# Altium PCB MM_2.0_power_pcb.PcbDoc
Units mm, origin at the board's own origin, x right, y up, seen from the top; angles counter-clockwise.
Board outline 65 x 47 mm, 4 copper layers (Top_Layer, INT_L1_GND, INT_L2_GND, Bottom_Layer), stack 1.586 mm thick; 27 components, 15 nets, 74 pads, 41 vias.
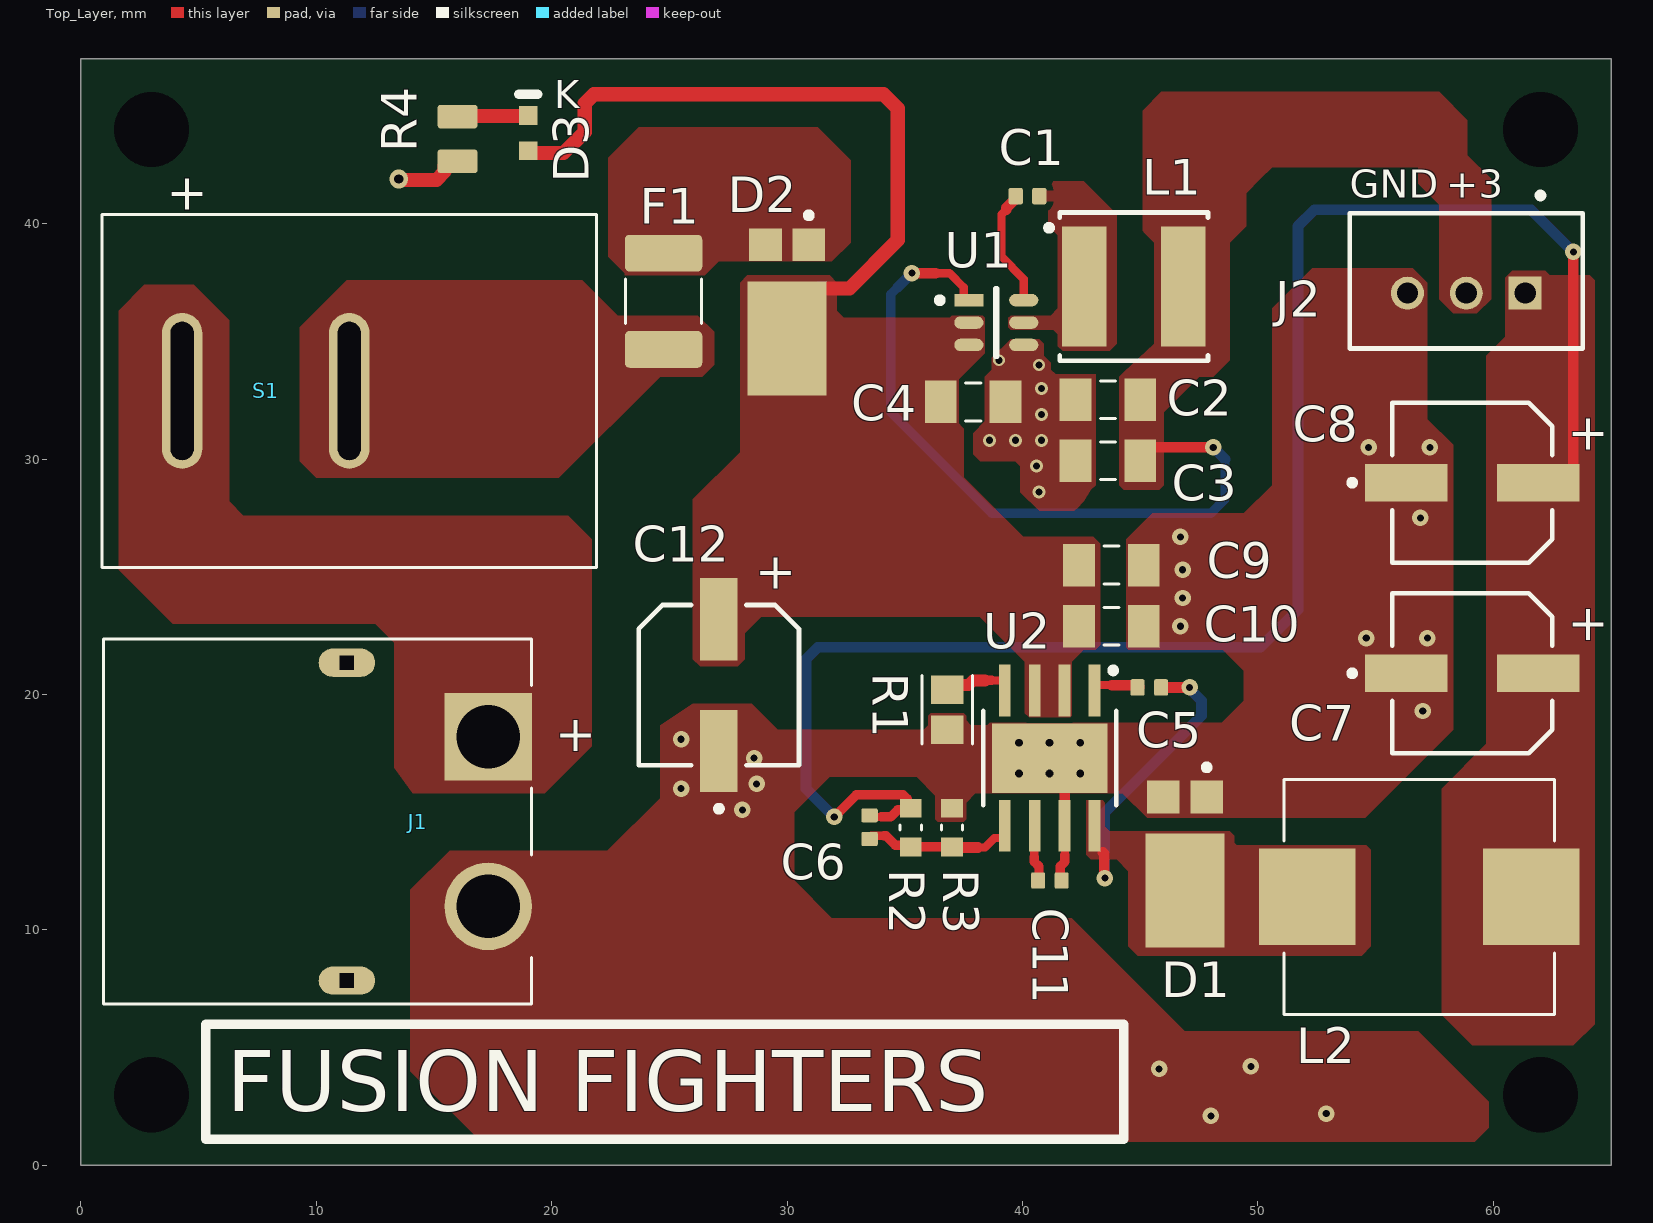
[diagram p0: Top_Layer view]
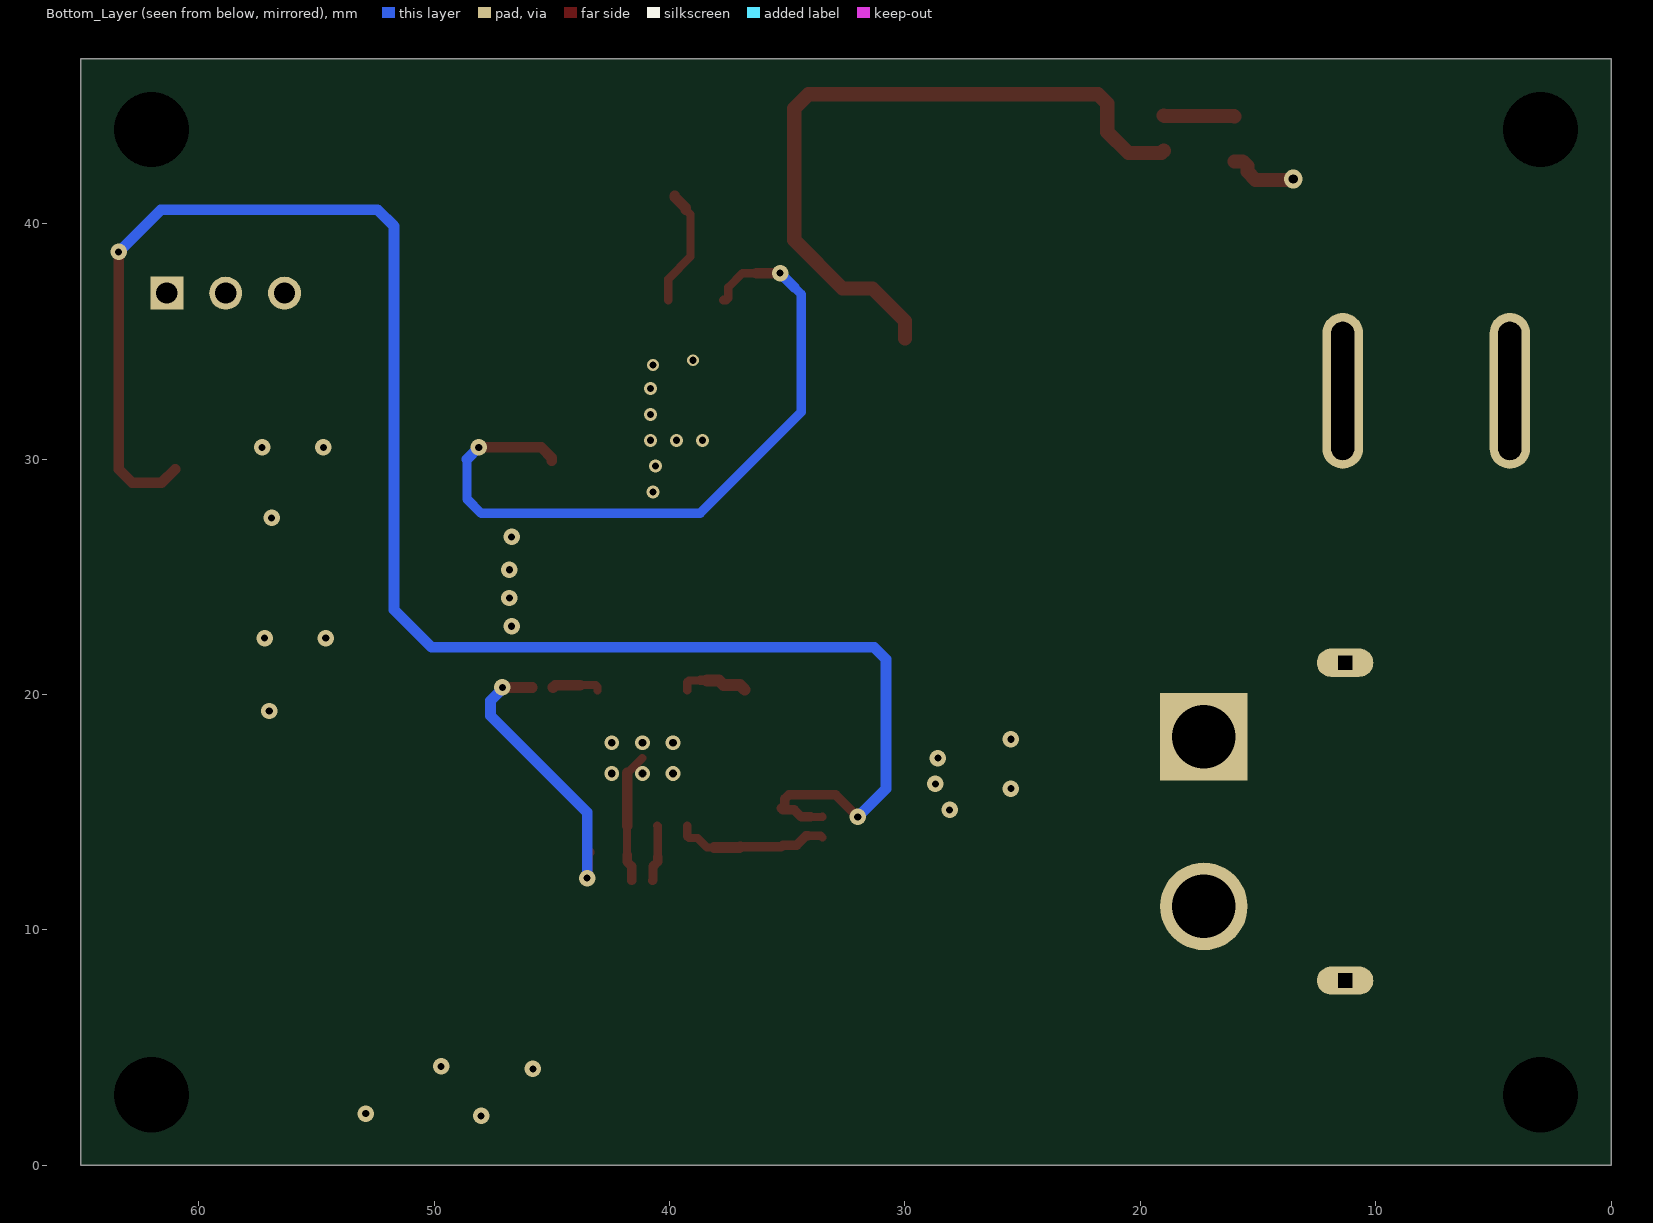
[diagram p1: Bottom_Layer view, seen from below]
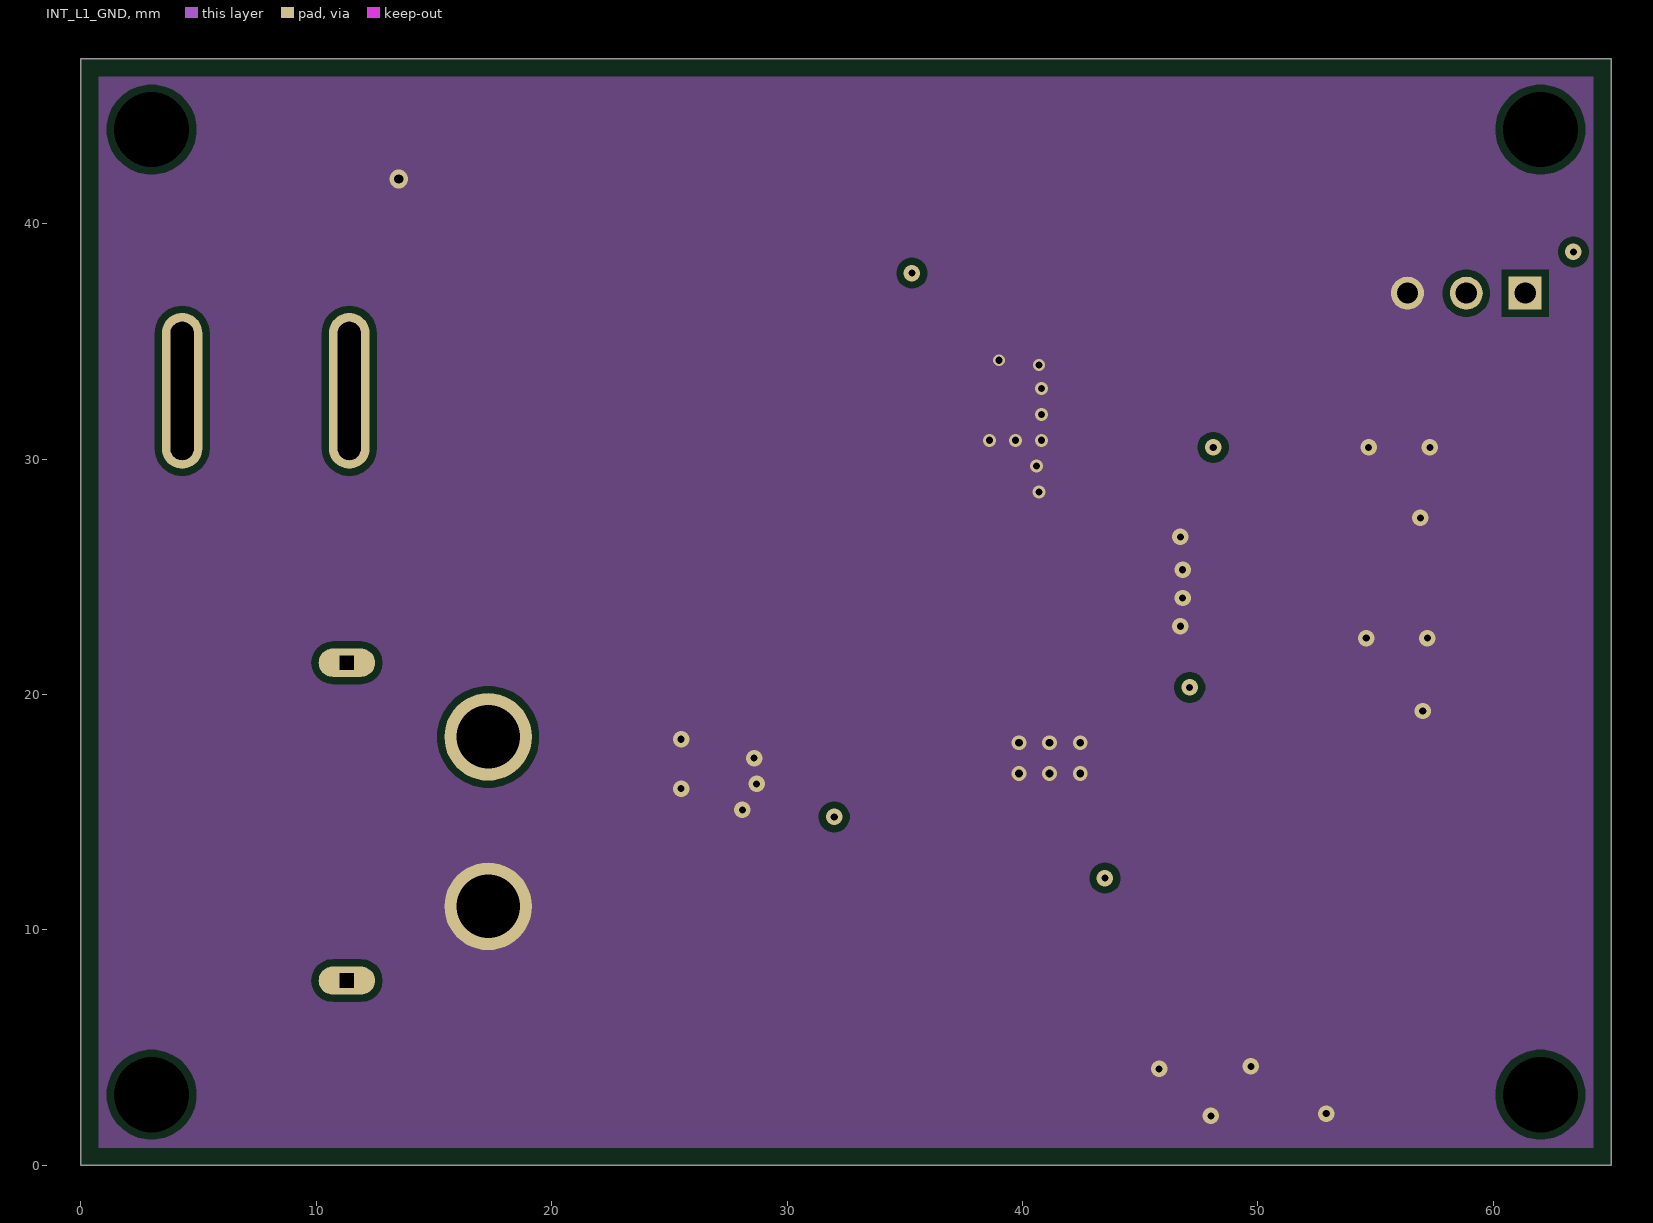
[diagram p2: INT_L1_GND]
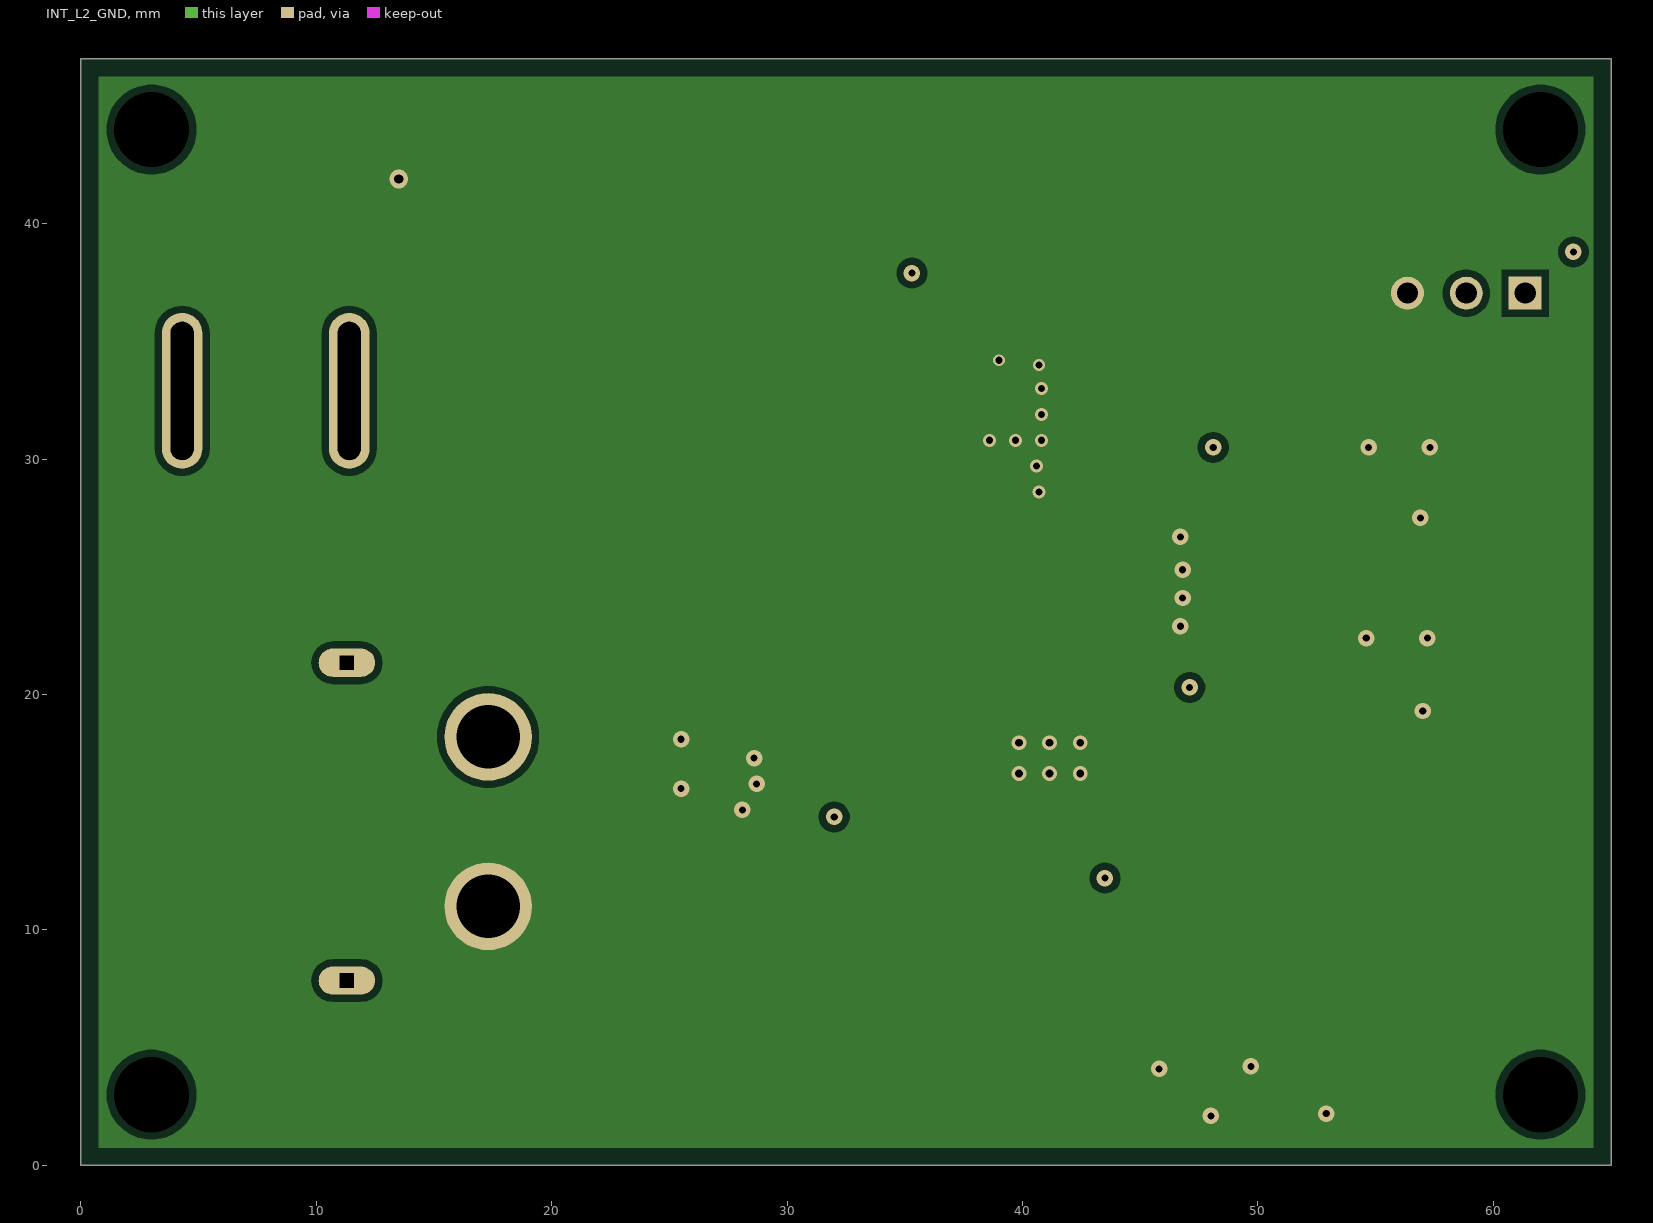
[diagram p3: INT_L2_GND]
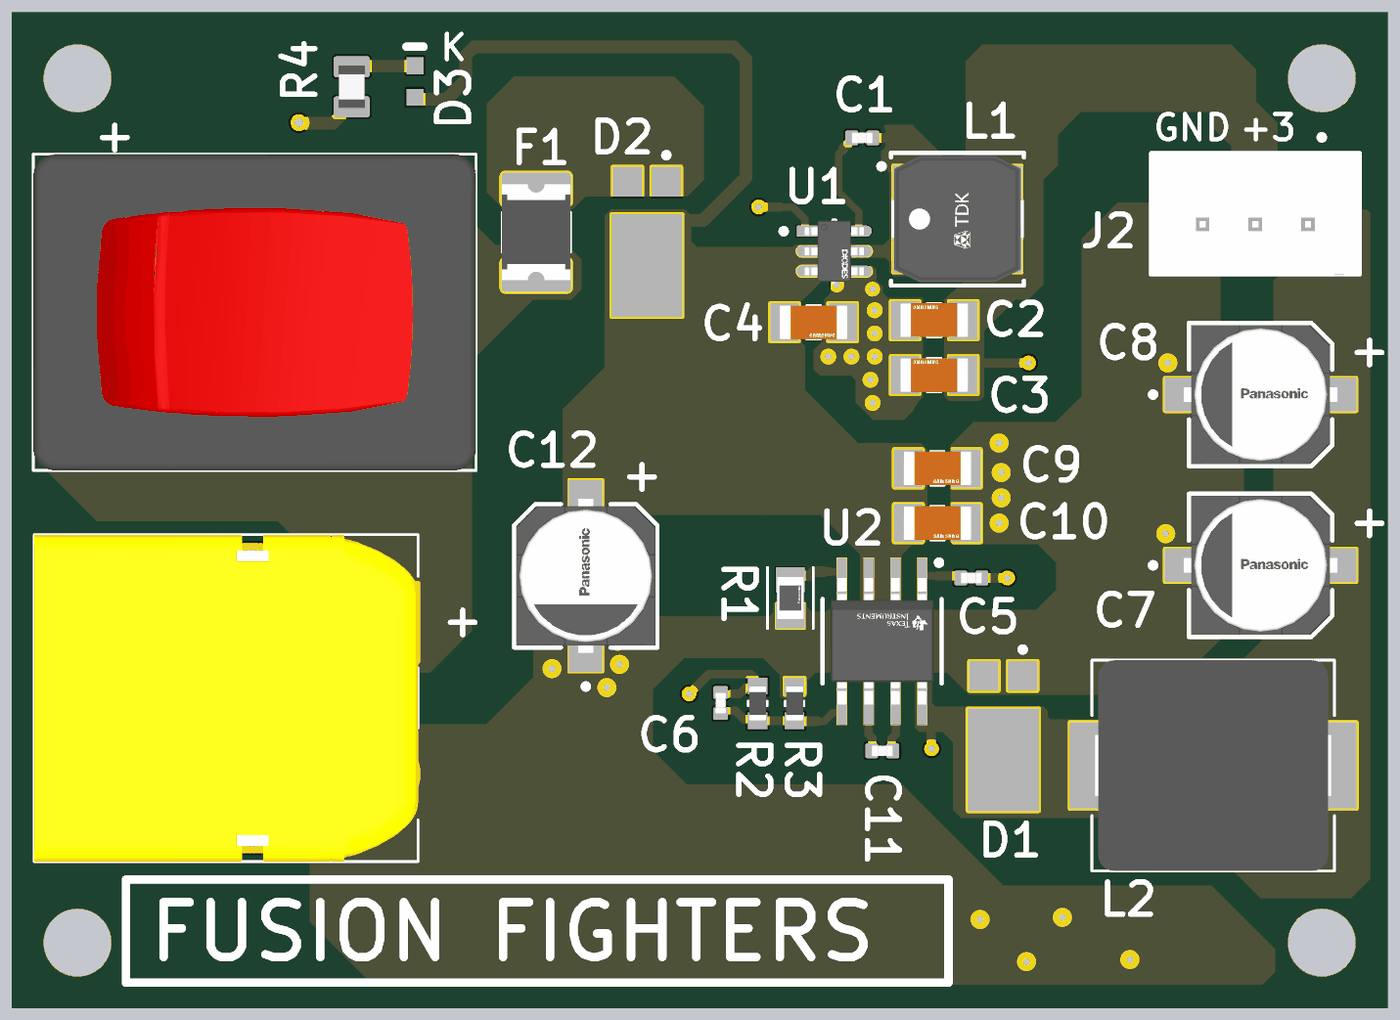
[diagram p4: 3D render of the assembled board from above, using the file's embedded part models]

## Layer stack, top to bottom
Top Solder: solder mask 0.0254, SM-001, Dk 4
Top_Layer: signal copper 0.035
Dielectric 1: prepreg 0.2104, PP-017, Dk 4.4
INT_L1_GND: signal copper 0.0152
Dielectric 3: core 1.065, Core-039, Dk 4.6
INT_L2_GND: signal copper 0.0152
Dielectric 5: prepreg 0.2104, PP-017, Dk 4.4
Bottom_Layer: signal copper 0.035
Bottom Solder: solder mask 0.0254, SM-001, Dk 4

## Board outline
0,0 65,0 65,47 0,47

## Design rules (kind name [scope] priority, off if disabled: settings)
Clearance [All] p1: gap=0.2 ignorepadtopadclearanceinfootprint=FALSE except(0: Arc-Hole Track-Hole SMDPad-Hole THPad-Hole Via-Hole Fill-Hole Poly-Hole Region-Hole Text-Hole; 0.25: Arc-Fill Arc-Poly Arc-Region Track-Fill Track-Poly Track-Region SMDPad-Fill SMDPad-Poly SMDPad-Region Fill-Fill Fill-Poly Fill-Region Poly-Poly Poly-Region Region-Region; 0.3: THPad-Fill THPad-Poly THPad-Region Via-Fill Via-Poly Via-Region; 0.35: Arc-THPad Track-THPad SMDPad-THPad THPad-THPad)
HoleSize [All] p1: absolutevalues=TRUE maxlimit=6.3 minlimit=0.25 maxpercent=80.000 minpercent=20.000
HoleToHoleClearance [All] p1: gap=0.5 allowstackedmicrovias=TRUE
MinimumSolderMaskSliver [All] p1: minsoldermaskwidth=0.15
PlaneClearance [All] p1: clearance=0.25
PolygonConnect [All] p1: connectstyle=Direct reliefconductorwidth=0.254 reliefentries=4 polygonreliefangle="90 Angle" airgapwidth=0.254
RoutingVias [All] p1: holewidth=0.3 width=0.7 viastyle="Through Hole" minholewidth=0.3 minwidth=0.4 maxholewidth=0.7 maxwidth=1.2
SilkToSilkClearance [All] p1: silktosilkclearance=0.2
SilkToSolderMaskClearance [IsPad] p1: minsilkscreentomaskgap=0.2 clearancetoexposedcopper=TRUE
SolderMaskExpansion [All] p1: expansion=0.102 istentingtop=FALSE
UnRoutedNet [All] p1: checkbadconnections=TRUE
Width [All] p1: maxlimit=1 minlimit=0.2 preferedwidth=0.3 toplayer_prefwidth=0.35 midlayer1_minwidth=0.254 midlayer1_maxwidth=0.254 midlayer1_prefwidth=0.254 midlayer2_minwidth=0.254 midlayer2_maxwidth=0.254 midlayer2_prefwidth=0.254 minimp=50.000000 maximp=50.000000 favimp=50.000000
23 further rules are at their usual default settings.

## Components (designator, comment, footprint, x,y, rotation, side; value= is the part's Value field where it differs from the comment)
C1 "100n" CAP_0402 40.21,41.175 r180 top
C2 "22u" CAPC320160X160_CL31H-0_2_N 43.624,32.525 r180 top value=22uF
C3 "22u" CAPC320160X160_CL31H-0_2_N 43.624,29.925 r180 top value=22uF
C4 "22u" CAPC320160X160_CL31H-0_2_N 37.902,32.428 r0 top value=22uF
C5 "100n" CAP_0402 45.385,20.3 r180 top
C6 "390p" CAP_0402 33.5,14.365 r270 top
C7 "100u" FP-OS-CON-SMT-C6-MFG 59.1,20.9 r0 top locked
C8 "100u" FP-OS-CON-SMT-C6-MFG 59.1,29 r0 top locked
C9 "22u" CAPC320160X160_CL31H-0_2_N 43.774,25.5 r0 top value=22uF
C10 "22u" CAPC320160X160_CL31H-0_2_N 43.774,22.9 r0 top value=22uF
C11 "8.2n" CAP_0402 41.16,12.1 r0 top
C12 "100u" FP-OS-CON-SMT-C6-MFG 27.1,20.4 r90 top locked
D1 "PDS760-13" DIOD-POWERDI5-3_V 46.9,12.8 r270 top locked
D2 "PDS760-13" DIOD-POWERDI5-3_V 30,36.25 r270 top locked
D3 "LTST-C190KSKT" LTST-C190KSKT_V 19,43.85 r90 top
F1 "1812L300/24SLER" FUSSC324X455X250-2N 24.75,36.705 r90 top locked
J1 "XT60PW-M" AMASS_XT60PW-M 11.3,14.6 r90 top locked
J2 "B3B-XH-A(LF)(SN)" FP-B3B-XH-A_LF_SN-MFG 58.85,37.575 r180 top locked
L1 "10u" FP-VLS6045EX-100M-MFG 44.725,37.325 r0 top locked
L2 "8.2u" IND_104CDMCCDS-8R2MC 56.85,11.4 r0 top locked
R1 "49.9K" FP-ERA6A_N 36.8,19.351 r90 top
R2 "91K" RESC1608X55N 35.25,14.345 r90 top
R3 "13K" RESC1608X55N 37,14.345 r270 top
R4 "5K" RES_0805 16,43.6 r90 top
S1 "RF1-1A-DC-2-R-1" SW_RF1-1A-DC-2-R-1 11.4,32.9 r0 top locked
U1 "AP63203WU-7" FP-TSOT26-IPC_B 38.884,35.8 r0 top locked
U2 "LMR14030SDDAR" FP-DDA0008E-MFG 41.15,17.3 r270 top locked

## Footprints (in the part's own frame and the unit in brackets; to place one, negate y for a bottom-side part, rotate by r counter-clockwise, add the part's x,y. Pads: shape width x height; smd on the part's side, far side on the other; paste and mask are expansions set on the pad)
AMASS_XT60PW-M [mm] "plug ROHS"
  rect 3.716x3.716 / inner round 3.716 / far side rect 3.716x3.716 hole 2.7: 1(3.6,-6)
  round 3.716 hole 2.7: 2(-3.6,-6)
  oval 1.2x2.4 hole 0.6 square: S1(6.75,0) S2(-6.75,0)
  silkscreen extent -7.75,-7.85 7.75,10.35, body extent -7.75,-7.85 7.75,10.35, height 8.4
CAP_0402 [mm]
  rrect25% 0.6x0.7 smd: 1(-0.5,0) 2(0.5,0)
  body extent -0.5,-0.26 0.5,0.26, height 0.37
CAPC320160X160_CL31H-0_2_N [mm] "25V 22uF X5R ±10% 1206 Multilayer Ceramic Capacitors MLCC - SMD/SMT ROHS"
  rect 1.354x1.806 smd: 1(-1.376,0) 2(1.376,0)
  silkscreen extent -0.32,-0.8 0.32,0.8, body extent -1.6,-0.8 1.6,0.8, height 1.8
DIOD-POWERDI5-3_V [mm] "60V 620mV@7A 7A Power-DI-5 Schottky Diodes ROHS"
  rect 1.4x1.39 smd: 1(-2.856,0.92) 2(-2.856,-0.92)
  rect 4.86x3.36 smd: 3(1.126,0)
  silkscreen extent -4.23,0.8 -3.98,1.05, body extent -2.69,-1.99 2.69,1.99, height 1.15
FP-B3B-XH-A_LF_SN-MFG [mm]
  rect 1.4x1.4 hole 0.9 paste-1000 mask+0: 1(-2.5,0.525)
  round 1.4 hole 0.9 paste-1000 mask+0: 2(0,0.525) 3(2.5,0.525)
  silkscreen extent -4.95,-3.75 4.95,2.88, body extent -5.05,-2.98 5.05,2.98, height 0.25
FP-DDA0008E-MFG [mm] "Buck Adjustable 800mV~28V 3.5A 4V~40V SO-8-EP DC-DC Converters ROHS"
  rect 2.2x0.5 smd paste-1000 mask+0: 1(-2.875,1.905) 2(-2.875,0.635) 3(-2.875,-0.635) 4(-2.875,-1.905) 5(2.875,-1.905) 6(2.875,-0.635) 7(2.875,0.635) 8(2.875,1.905)
  rect 2.95x4.9 smd paste-1000 mask-1000: 9(0,0)
  silkscreen extent -3.85,-2.83 2,2.83, body extent -4.08,-2.68 4.08,2.68, height 0.25
FP-ERA6A_N [mm] "50V 8.2nF X7R ±10% 0402 Multilayer Ceramic Capacitors MLCC - SMD/SMT ROHS"
  rect 1.205x1.362 smd paste+0 mask+0.05: 1(-0.851,0) 2(0.851,0)
  silkscreen extent -1.45,-1.08 1.45,1.08, body extent -1.7,-0.93 1.7,0.93, height 0.25
FP-OS-CON-SMT-C6-MFG [mm] "16V 100uF Polymer ±20% 24mO@100kHz 2.49A@100kHz SMD,D6.3xL5.9mm Polymer Aluminum Capacitors ROHS"
  rect 3.5x1.6 smd paste+0 mask+0.08: 1(-2.8,0) 2(2.8,0)
  silkscreen extent -5.22,-3.4 3.4,3.4, body extent -4.8,-3.65 4.8,3.65, height 0.25
FP-TSOT26-IPC_B [mm] "Buck Fixed 2A 3.3V 3.8V~32V TSOT-23-6 DC-DC Converters ROHS"
  rect 1.24x0.526 smd paste+0 mask+0.05: 1(-1.165,0.95)
  rrect100% 1.24x0.526 smd paste+0 mask+0.05: 2(-1.165,0) 3(-1.165,-0.95) 4(1.166,-0.95) 5(1.166,0) 6(1.166,0.95)
  silkscreen extent -2.52,-1.45 0.05,1.45, body extent -2.04,-1.7 2.04,1.7, height 0.25
FP-VLS6045EX-100M-MFG [mm] "3.4A 10uH ±20% 3.9A SMD,6x6mm Power Inductors ROHS"
  rect 1.9x5.1 smd paste+0 mask+0.08: 1(-2.1,0) 2(2.1,0)
  silkscreen extent -3.72,-3.15 3.15,3.15, body extent -3.25,-3.25 3.25,3.25, height 0.25
FUSSC324X455X250-2N [mm] "24V 3A 50A 6A 1812 Resettable Fuses ROHS"
  rrect25% 1.56x3.29 smd: 1(-2.045,0) 2(2.045,0)
  silkscreen extent -0.94,-1.62 0.94,1.62, body extent -2.27,-1.62 2.27,1.62, height 2.5
IND_104CDMCCDS-8R2MC [mm] "8.3A 8.2uH Molded Inductor ±20% 12A SMD,11.5x10mm Power Inductors ROHS"
  rect 4.1x4.1 smd: 1(-4.75,0) 2(4.75,0)
  silkscreen extent -5.75,-5 5.75,5, body extent -5.6,-5 5.6,5, height 4
LTST-C190KSKT_V [mm] "SMD, 2-Leads, Body 1.6x0.8mm, LED 603"
  rect 0.8x0.8 smd: 1(-0.75,0) 2(0.75,0)
  silkscreen extent 1.65,-0.4 1.65,0.4, body extent -0.8,-0.4 0.8,0.4, height 0.9
RES_0805 [mm]
  rrect25% 1x1.7 smd: 1(-0.95,0) 2(0.95,0)
  body extent -1,-0.63 1,0.63, height 0.47
RESC1608X55N [mm] "100mW Thick Film Resistor 75V ±100ppm/? ±1% 91kO 0603 Chip Resistor - Surface Mount ROHS"
  rect 0.79x0.93 smd: 1(-0.82,0) 2(0.82,0)
  silkscreen extent -0.11,-0.45 0.11,0.45, body extent -0.8,-0.4 0.8,0.4, height 0.55
SW_RF1-1A-DC-2-R-1 [mm] "Rocker Switch"
  oval 1.72x6.62 hole 0.98 slot 5.88 at 90 deg: 1(-7.1,0) 2(0,0)
  silkscreen extent -10.5,-7.5 10.5,7.5, body extent -10.5,-7.5 10.5,7.5, height 17.01

## Part data
C1 C5 C6 C11: library part CL05B104KO5NNNC, "0.1 ÂµF Â±10% 16V Ceramic Capacitor X7R 0402 (1005 Metric)", Package="SMD-2-2 Samsung", Check_prices=https://www.snapeda.com/parts/CL05B104KO5NNNC/Samsung/view-part/?ref=eda, MF=Samsung, MP=CL05B104KO5NNNC, SnapEDA_Link=https://www.snapeda.com/parts/CL05B104KO5NNNC/Samsung/view-part/?ref=snap
C2 C3 C4 C9 C10: library part CMP-13271-000012-2, "Ceramic Capacitor, Multilayer, Ceramic, 25V, 10% +Tol, 10% -Tol, X5R, 15% TC, 22uF, Surface Mount, 1206", Capacitance=22uF, Case/Package=1206, Dielectric=X5R, Digikey Part Number=1276-3047-1-ND, Manufacturer=Samsung, Max Operating Temperature=85°C, Min Operating Temperature=-55°C, Mouser Part Number=187-CL31A226KAHNNNE, Package=CL31H-0.2, Part Number=CL31A226KAHNNNE, Temperature="-55°C to +85°C", Temperature Coefficient=15%, Temperature Range High=+85°C, Tolerance=10%, Voltage Rating=25V, Automotive=No, ComponentLink1Description=Upverter, ComponentLink1URL=https://upverter.com/part/id/4e7a76ad8fe2f2e1/, ComponentLink2Description=Datasheet, ComponentLink2URL=https://product.samsungsem.com/mlcc/CL31A226KAHNNN.do, Digikey Description="CAP CER 22UF 25V X5R 1206", Height=1.8mm, helpURL=https://upverter.com/part/id/4e7a76ad8fe2f2e1/, Ipc Land Pattern Name=CAPC320160X160, Lead Free=Yes, Material=Ceramic, RoHS=TRUE, Supplier 1=Digi-Key, Supplier 2=Mouser, Supplier Part Number 1=1276-3047-1-ND, Supplier Part Number 2=187-CL31A226KAHNNNE, Symbol Hash=fb88589c83559698c54462c48d907c3ddae810bd717f4f20b193cecb944ab7ab, Temperature Characteristic=X5R, Temperature Range Low=-55°C, Verification Version=0.0.0.3, Voltage Rating (DC)=25V
C7 C8 C12: library part CMP-05428-000037-2, "Conductive Polymer Aluminum Solid Capacitors (OS-CON) 100uF ±20% 16V", Capacitance=100uF, Case/Package=Radial, ESR (Equivalent Series Resistance)=24mR, Leakage Current=300uA, Max Operating Temperature=105°C, Min Operating Temperature=-55°C, Package Quantity=1000, Ripple Current=2.49A, Tolerance=20%, Voltage=16V, Construction=Cylindrical, Diameter=6.3mm, Dissipation Factor=12%, Height=5.9mm, Height - Seated (Max)=0.236inch, Lead Free="Lead Free", Length=5.9mm, Life (Hours)=2000Hour, Mount="Surface Mount", Number of Pins=6, Packaging="Tape and Reel", Polarity=Polar, Radiation Hardening=No, REACH SVHC="No SVHC", Ripple Current (AC)=2.49A, RoHS Compliant=Yes, Series="OS-CON™, SVPC", Termination=SMD/SMT, Voltage Rating=16V, Voltage Rating (DC)=16V
D1 D2: library part CMP-2000-07476-1, "Schottky Barrier Rectifier, 60 V, 7 A, -65 to 150 degC, 3-Pin SMD, RoHS, Tape and Reel", Average Rectified Current=7A, Case\/Package=SMD/SMT, Forward Voltage=620mV, Manufacturer="Diodes Inc", Max Forward Surge Current (Ifsm)=275A, Max Operating Temperature=150degC, Max Repetitive Reverse Voltage (Vrrm)=60V, Min Operating Temperature=-65degC, Package Description="3-Pin Surface Mount Device, Body 3.975 x 5.375 mm, Pitch 1.84 mm", Package Quantity=5000, Package Reference=POWERDI5-3, Peak Reverse Current=200uA, Contact Plating=Matte, Current Rating=7A, Datasheet URL=https://www.diodes.com/assets/Datasheets/ds30477.pdf, Datasheet Version="Rev. 13-2, 10/2012", Element Configuration=CommonAnode, Forward Current=7A, Height=1.15mm, Lead Free=LeadFree, Length=4.05mm, Manufacturer URL=http://www.diodes.com/, Mount=SurfaceMount, Mounting Technology=SurfaceMount, Number of Pins=5, Output Current=7A, Packaging=TapeandReel, Peak Non-Repetitive Surge Current=275A, Polarity=Standard, Radiation Hardening=No, REACH SVHC=NoSVHC, Reverse Voltage (DC)=60V, RoHSCompliant=true, Voltage Rating (DC)=60V, Weight=0.003386oz, Width=5.45mm
D3: library part CMP-1674-00009-1, "LED Uni-Color Yellow, 75 mW, 30 mA, -30 to 85 degC, 2-Pin SMD, RoHS, Tape and Reel", Case Code (Imperial)=0603, Case Code (Metric)=1608, Max Operating Temperature="155 degC", Min Operating Temperature="-55 degC", Package Quantity=5000, Power Rating="100 mW", Resistance="12 kohm", Tolerance=1%, Voltage Rating="50 V", Case\Package=0603, ComponentLink1Description="Manufacturer URL", ComponentLink1URL=http://www.us.liteon.com/, ComponentLink2Description=Datasheet, ComponentLink2URL=http://optoelectronics.liteon.com/upload/download/DS-22-99-0189/S_110_LTST-C190KSKT.pdf, DatasheetVersion="Rev. I, 10/2012", Height="0.45 mm", Length="1.6 mm", Mount="Surface Mount", PackageDescription="2-Pin Surface Mount Device, Body 1.6 x 0.8 mm", PackageReference=C190KSKT, Packaging="Tape and Reel", Pins=2, REACH SVHC="No SVHC", RoHSCompliant=true, Voltage Rating (DC)="50 V", Width="0.8 mm"
F1: "Polymeric PTC Resettable Fuse 24V 3 A Ih Surface Mount 1812 (4532 Metric), Concave", Package=None, Availability="In Stock", Check_prices=https://www.snapeda.com/parts/1812L300/24SLER/Littelfuse/view-part/?ref=eda, MF="Littelfuse Inc.", MP=1812L300/24SLER, Price=None, Purchase-URL=https://pricing.snapeda.com/search/part/1812L300/24SLER/?ref=eda, SnapEDA_Link=https://www.snapeda.com/parts/1812L300/24SLER/Littelfuse/view-part/?ref=snap
J1: "Socket, DC supply, male, PIN: 2", Package=Package, Availability="Not in stock", Check_prices=https://www.snapeda.com/parts/XT60PW-M/AMASS/view-part/?ref=eda, MF=AMASS, MP=XT60PW-M, Price=None, SnapEDA_Link=https://www.snapeda.com/parts/XT60PW-M/AMASS/view-part/?ref=snap
J2: library part CMP-17439-000014-3, "CONN HEADER VERT 3POS 2.5MM", Color=Natural, Contact Resistance=20mR, Current Rating=3A, Flammability Rating="UL94 V-0", Housing Color=White, Insulation Resistance=1GR, Max Operating Temperature=85°C, Max Voltage Rating (AC)=250V, Min Operating Temperature=-25°C, Connector Type=Header, Contact Finish - Mating=TIN, Contact Material=Brass, Contact Plating=Tin, Contact Shape=Square, Contact Type="Male Pin", Depth=5.75mm, Fastening Type=Detent, Gender=Male, Housing Material=Polyamide, Insulation Color=Natural, Insulation Material=Nylon, Lead Free="Lead Free", Lead Pitch=2.5mm, Length=9.9mm, Max Current Rating=3A, Max Voltage Rating (DC)=250V, Mount="Through Hole", Number of Contacts=3, Number of Positions=3, Number of Rows=1, Orientation=Straight, Packaging=Bulk, Pitch=2.5mm, REACH SVHC="No SVHC", Series=XH, Termination=Solder, Voltage Rating=250V, Voltage Rating (AC)=250V, Wire/Cable Gauge=22AWG
L1: library part CMP-08253-000184-1, "FIXED IND 10UH 3.4A 61 MOHM SMD", Case/Package=Nonstandard, Current Rating=3.4A, DC Resistance (DCR)=61mR, Inductance=10uH, Inductance Tolerance=20%, Max Operating Temperature=105°C, Min Operating Temperature=-40°C, Resistor Type=Wirewound, Saturation Current=3.9A, Test Frequency=100kHz, Core Material=Ferrite, Height - Seated (Max)=0.177inch, Lead Free="Lead Free", Length=0.236inch, Mount="Surface Mount", Packaging="Cut Tape", REACH SVHC="No SVHC", RMS Current (Irms)=3.4A, RoHS Compliant=Yes, Shielding=Shielded, Tolerance=20%, Width=0.236inch
L2: library part 104CDMCCDS-8R2MC, "Inductor Power Shielded/Molded Wirewound 8.2uH 20% 100KHz Metal 8.3A 0.027Ohm DCR 4040 T/R", Package="Nonstandard Sumida", Availability="In Stock", Check_prices=https://www.snapeda.com/parts/104CDMCCDS-8R2MC/Sumida/view-part/?ref=eda, MF=Sumida, MP=104CDMCCDS-8R2MC, Price=None, Purchase-URL=https://pricing.snapeda.com/search/part/104CDMCCDS-8R2MC/?ref=eda, SnapEDA_Link=https://www.snapeda.com/parts/104CDMCCDS-8R2MC/Sumida/view-part/?ref=snap
R1: library part CMP-2001-00839-2, "Res Thin Film 0805 49.9K Ohm 0.1% 0.125W(1/8W) +/-25ppm/ßC SMD Automotive T/R", Case Code (Imperial)=0805, Case Code (Metric)=2012, Max Operating Temperature=155°C, Max Power Dissipation=125mW, Min Operating Temperature=-55°C, Resistance=49.9kΩ, Temperature Coefficient=25ppm/°C, Tolerance=0.1%, Voltage Rating=100V, Case/Package=0805, Composition="Metal Film, Thin Film", Contact Plating=Tin, Depth=1.25mm, Features="Automotive AEC-Q200", Height=500µm, Lead Free="Lead Free", Length=2mm, Lifecycle Status=Production, Military Standard=Not, Mount="Surface Mount", Number of Pins=2, Number of Terminations=2, Packaging="Cut Tape", Power Rating=125mW, Radiation Hardening=No, REACH SVHC=Unknown, RoHS=Compliant, Schedule B="8533210045, 8533210045|8533210045|8533210045|8533210045|8533210045|8533210045|8533210045|8533210045|8533210045|8533210045|8533210045|8533210045|8533210045|8533210045|8533210045|8533210045, 8533210045|8533210045|8533210045|8533210045|8533210045|8533210045|8533210045|8533210045|8533210045|8533210045|8533210045|8533210045|8533210045|8533210045|8533210045|8533210045|8533210045, 8533210045|8533210045|8533210045|8533210045|8533210045|8533210045|8533210045|8533210045|8533210045|8533210045|8533210045|8533210045|8533210045|8533210045|8533210045|8533210045|8533210045|8533210045", Termination=SMD/SMT, Voltage Rating (DC)=100V, Weight=5.499807mg
R2 R3: library part RC0603FR-0791KL, "91 kOhms Â±1% 0.1W, 1/10W Chip Resistor 0603 (1608 Metric) Moisture Resistant Thick Film", Package="1608 Yageo", Check_prices=https://www.snapeda.com/parts/RC0603FR-0791KL/Yageo/view-part/?ref=eda, MF=Yageo, MP=RC0603FR-0791KL, SnapEDA_Link=https://www.snapeda.com/parts/RC0603FR-0791KL/Yageo/view-part/?ref=snap
R4: library part RES_0805, "Resistor SMD 0805"
S1: "Switch, Mini Rocker, 2P SPST OFF-ON, Red w/ Print, VDC", Package=None, Check_prices=https://www.snapeda.com/parts/RF1-1A-DC-2-R-1/Switch+Components/view-part/?ref=eda, MF="Switch Components", MP=RF1-1A-DC-2-R-1, SnapEDA_Link=https://www.snapeda.com/parts/RF1-1A-DC-2-R-1/Switch+Components/view-part/?ref=snap
U1: library part CMP-12757-000006-1, "IC REG BUCK 3.3V 2A TSOT26", Ambient Temperature Range High=+85°C, Ambient Temperature Range Low=-40°C, Manufacturer="Diodes Inc.", Max Junction Temp=+160°C, Max Supply Voltage=32V, Min Supply Voltage=3.8V, Nominal Supply Current=22uA, Output Current=2A, Output Voltage=3.3V, Package=TSOT26, Switching Frequency=1.1MHz, Temperature="to +160°C", Automotive=No, Category=IC, ComponentLink2Description=Datasheet, ComponentLink2URL=https://www.diodes.com/assets/Datasheets/AP63200-AP63201-AP63203-AP63205.pdf, Device Class L1="Integrated Circuits (ICs)", Device Class L2="Power Management ICs", Device Class L3="Voltage Regulators - Switching", Digikey Description="IC REG BUCK 3.3V 2A TSOT26", Footprint Url=https://www.diodes.com/assets/Package-Files/TSOT26.pdf, Height=1mm, Lead Free=Yes, Manufacturer Part Number=AP63203WU-7, Mouser Description="AP63203 Series 3.3 V 2 A SMT Fixed Low IQ Synchronous Buck - TSOT-26", Number Of Outputs=1, Octopart=https://octopart.com/ap63203wu-7-diodes+inc.-98099550, Output Type=Fixed, RoHS=TRUE, Standoff Height=0.01mm, Switching Topology=Buck, Temperature Range High=+160°C
U2: library part CMP-04918-000074-1, "IC REG BUCK ADJ 3.5A 8SOPWR", Manufacturer="Texas Instruments", Max Junction Temp=+125°C, Max Supply Voltage=40V, Min Supply Voltage=4V, Nominal Supply Current=40uA, Output Current=3.5A, Output Voltage=0.8-28V, Package=DDA0008E, Switching Frequency=200-2500kHz, Temperature="-40°C to +125°C", Temperature Range Low=-40°C, Automotive=No, Category=IC, ComponentLink2Description=Datasheet, ComponentLink2URL=http://www.ti.com/lit/ds/symlink/lmr14030.pdf, Device Class L1="Integrated Circuits (ICs)", Device Class L2="Power Management ICs", Device Class L3="Voltage Regulators - Switching", Digikey Description="IC REG BUCK ADJ 3.5A 8SOPWR", Height=1.7mm, Ipc Land Pattern Name=SOIC127P600X170-8, Lead Free=Yes, Manufacturer Part Number=LMR14030SDDAR, Max Duty Cycle=97%, Mouser Description="40V, 3.5A SIMPLE SWITCHER, 2.2MHz Step-Down Regulator with 40uA IQ 8-SO PowerPAD -40 to 125", Number Of Outputs=1, Octopart=https://octopart.com/lmr14030sddar-texas+instruments-55347267, Output Type=AdjustableProgrammable, RoHS=TRUE, Standoff Height=0mm, Switching Topology=Buck, Temperature Range High=+125°C

## Free pads (board coordinates)
  round 1.524 hole 3.2: MH(3,3) MH(3,44) MH(62,3) MH(62,44)

## Via types
v1: diameter 0.7, hole 0.3, Top_Layer to Bottom_Layer, 25 vias
v2: diameter 0.55, hole 0.3, Top_Layer to Bottom_Layer, 7 vias
v3: diameter 0.63, hole 0.33, Top_Layer to Bottom_Layer, 6 vias
v4: diameter 0.5, hole 0.3, Top_Layer to Bottom_Layer, 2 vias
v5: diameter 0.8, hole 0.4, Top_Layer to Bottom_Layer, 1 vias

## Nets (pads, with @x,y where several pads share a name; then routed paths per layer and width w, separated by ;. In a path a pad name is that pad's centre, name@x,y a point inside that pad or via, vN(x,y) a via of type N, cw(c..) or ccw(c..) an arc to the next point about the centre after c; other vN are vias at no path point)
+3V3_BUCK: C2.1 C3.1 J2.2 L1.2 U1.1 | length 31.5
  Top_Layer w0.35: 36.3,37.9 36.9,37.9 37.5,37.3 37.5,36.838 37.588,36.75 U1.1 U1.1@37.7,36.769
  Top_Layer w0.45: v1(35.3,37.9) 36.3,37.9 ; C3.1 45,30.048 45.452,30.5 v1(48.1,30.5)
  Bottom_Layer w0.4: 34.7,37.3 34.4,37 34.4,32 38.7,27.7 48,27.7 48.6,28.3 48.6,30
  Bottom_Layer w0.45: 34.7,37.3 v1(35.3,37.9) ; v1(48.1,30.5) 48.6,30
+6V_BUCK: C6.1 C7.2 C8.2 J2.1 L2.2 R2.2 | length 76
  Top_Layer w0.35: C6.1@33.5,14.805 33.505,14.8 34,14.8
  Top_Layer w0.4: v1(32,14.8) 32.943,15.743 34.923,15.743 35.1,15.566 35.1,15.315 R2.2 35.185,15.1 34.7,15.1 34.4,14.8 34,14.8
  Top_Layer w0.45: C8.2@61,29.575 61.575,29 C8.2 62.825,29 63.4,29.575 v1(63.4,38.8)
  Bottom_Layer w0.45: v1(32,14.8) 30.8,16 30.8,21.5 31.3,22 50.1,22 51.7,23.6 51.7,39.9 52.4,40.6 61.6,40.6 v1(63.4,38.8)
BUCK1_BST: C1.2 U1.6 | length 5.1
  Top_Layer w0.35: 39.3,40.6 39.1,40.4 39.1,38.6 40.05,37.65 U1.6
  Top_Layer w0.45: 39.3,40.6 39.3,40.665 39.77,41.135 C1.2@39.77,41.175
BUCK1_SW: C1.1 L1.1 U1.5
BUCK2_BOOT: C5.2 U2.1 | length 2.1
  Top_Layer w0.35: U2.1 43.055,20.325 43.13,20.4 43.8,20.4
  Top_Layer w0.45: 43.8,20.4 44.85,20.4 44.945,20.305 C5.2@44.945,20.3
BUCK2_FB: C6.2 R2.1 R3.2 U2.5 | length 6.6
  Top_Layer w0.35: C6.2@33.5,13.925 33.575,14 34.1,14 ; 38.1,13.5 38.4,13.5 38.8,13.9 39.17,13.9 39.245,13.975 U2.5
  Top_Layer w0.4: 34.1,14 34.2,14 34.6,13.6 35.175,13.6 R2.1 R3.2
  Top_Layer w0.45: R3.2 37.025,13.5 38.1,13.5
BUCK2_RT: R1.2 U2.4 | length 3
  Top_Layer w0.35: 38.7,20.6 39.17,20.6 39.245,20.525 U2.4
  Top_Layer w0.4: 38.4,20.6 38.7,20.6
  Top_Layer w0.5: R1.2 36.998,20.4 37.7,20.4 37.9,20.6 38.4,20.6
BUCK2_SS: C11.1 U2.6 | length 2.4
  Top_Layer w0.35: 40.5,13.1 40.5,14.41 U2.6
  Top_Layer w0.4: 40.5,13.1 40.5,12.9 40.7,12.7 40.7,12.12 C11.1@40.72,12.1
BUCK2_SW: C5.1 D1.3 L2.1 U2.8 | length 12.4
  Top_Layer w0.45: 43.4,13.3 43.475,13.225 43.475,12.225 v1(43.5,12.2) ; C5.1@45.825,20.3 v1(47.1,20.3)
  Bottom_Layer w0.45: v1(43.5,12.2) 43.5,15 47.6,19.1 47.6,19.732 47.1,20.232 v1(47.1,20.3)
DIODE_A: D2.1 D2.2 F1.2
GND: C2.2 C3.2 C4.2 C7.1 C8.1 C9.2 C10.2 C11.2 C12.1 D1.1 D1.2 J1.2 J2.3 R1.1 R3.1 R4.1 U1.4 U2.7 U2.9 | length 8.5
  Top_Layer w0.35: U2.9 U2.9@41.785,16.665 ; U2.7 41.8,14.41 41.8,13.2
  Top_Layer w0.4: C11.2@41.6,12.1 41.6,12.7 41.8,12.9 41.8,13.2
  Top_Layer w0.45: U2.7 U2.9@41.785,16.665
  Top_Layer w0.6: v5(13.5,41.9) 13.538,41.862 15.099,41.862 15.45,42.213 15.45,42.45 15.65,42.65 R4.1
  other v1: 48,2.1 52.9,2.2 45.8,4.1 49.7,4.2 28.1,15.1 25.5,16 28.7,16.2 28.6,17.3 25.5,18.1 57,19.3 54.6,22.4 57.2,22.4 46.7,22.9 46.8,24.1 46.8,25.3 46.7,26.7 56.9,27.5 54.7,30.5 57.3,30.5
  other v2: 40.7,28.6 40.6,29.7 38.6,30.8 39.7,30.8 40.8,30.8 40.8,31.9 40.8,33
  other v3: 39.85,16.65 41.15,16.65 42.45,16.65 39.85,17.95 41.15,17.95 42.45,17.95
  other v4: 40.7,34 39,34.2
PLED_K: D3.2 R4.2 | length 3
  Top_Layer w0.6: R4.2 16.025,44.575 18.975,44.575 D3.2
VBAT: J1.1 S1.1
VBAT_REG: C4.1 C9.1 C10.1 C12.2 D2.3 D3.1 U1.2 U1.3 U2.2 U2.3 | length 30.2
  Top_Layer w0.6: D3.1 19.1,43 20.5,43 21.4,43.9 21.4,45.1 21.8,45.5 34.1,45.5 34.7,44.9 34.7,39.3 32.654,37.254 31.38,37.254 30,35.874 D2.3
VBAT_SW: F1.1 S1.2
pads on no net: J1.S1 J1.S2

## Polygon pours and split planes (outlines as drawn)
DIODE_A on Top_Layer "DIODE_A_L01_P031" (solid, pour order 31): 23.1,37.8 23.1,37.9 22.4,38.6 22.4,42.8 23.7,44.1 31.3,44.1 32.7,42.7 32.7,39.2 31.9,38.4 27.1,38.4 26.5,37.8
VBAT_SW on Top_Layer "VBAT_SW_L01_P029" (solid, pour order 29): 11.3,37.6 9.3,35.6 9.3,29.9 10,29.2 20.3,29.2 24.6,33.5 26.4,33.5 26.9,34 26.9,35.4 26.2,36.1 22.8,36.1 21.3,37.6
VBAT on Top_Layer "VBAT_L01_P028" (solid, pour order 28): 14.1,15.8 19.7,15.8 21.7,17.8 21.7,26.6 20.7,27.6 6.9,27.6 6.3,28.2 6.3,35.9 4.8,37.4 2.7,37.4 1.6,36.3 1.6,25.3 3.9,23 12.3,23 12.5,23 13.3,22.2 13.3,16.902 13.309,16.892
GND on Top_Layer "GND_L01_P026" (solid, pour order 26): 26,19.6 28.5,19.6 29.6,18.5 35.8,18.5 36,18.7 36,19.1 36.1,19.2 37.5,19.2 37.6,19.1 37.6,18.9 37.8,18.7 38.5,18.7 38.6,18.8 43.6,18.8 48.468,18.8 49.4,19.732 49.4,21 48.5,21.9 44.5,21.9 44.4,22 44.4,26.6 45.5,27.7 49.4,27.7 50.6,28.9 50.6,36.4 52.316,38.116 56.584,38.116 57.2,37.5 57.2,31.7 58.3,30.6 58.3,18.5 54.556,14.756 45.286,14.756 44.242,15.8 38,15.8 37.6,15.4 37.6,14.7 37.5,14.6 36.4,14.6 36.3,14.7 36.3,15.7 35.5,16.5 31.8,16.5 30.3,15 30.3,12.1 31.9,10.5 42.1,10.5 46.9,5.7 56.8,5.7 59.8,2.7 59.8,1.6 59.2,1 17,1 14,4 14,11.7 15.66,13.36 22.36,13.36 24.6,15.6 24.6,18.7
VBAT_REG on Top_Layer "VBAT_REG_L01_P025" (solid, pour order 25): 37.2,31.6 37.5,31.3 37.5,29.232 40.032,26.7 43,26.7 43.3,26.4 43.3,22.1 43.1,21.9 42.6,21.9 42.1,21.4 42.1,19.1 42,19 40.3,19 40.1,19.2 40.1,21.4 37,24.5 31.3,24.5 30,25.8 32.8,28.6 32.8,31.3 33.1,31.6
VBAT_REG on Top_Layer "VBAT_REG_L01_P027" (solid, pour order 27): 28.1,22.5 28.9,23.3 31.7,23.3 39.965,23.3 36.965,25.6 28.6,25.6 28.1,25.1
+6V_BUCK on Top_Layer "+6V_BUCK_L01_P018" (solid, pour order 18): 60.5,37.7 60.8,38 62.2,38 62.4,37.8 64.1,37.8 64.3,37.6 64.3,6 63.4,5.1 59.1,5.1 58.3,5.9 57.8,6.4 57.8,16 59.7,17.9 59.7,34.4 60.5,35.2
+3V3_BUCK on Top_Layer "+3V3_BUCK_L01_P008" (solid, pour order 8): 44.3,33.7 44.1,33.5 44.1,28.9 44.3,28.7 45.8,28.7 46,28.9 46,32 47.5,33.5 48.1,33.5 48.8,34.2 48.8,39.7 48.4,40.1 45.8,40.1 45.6,39.9 45.6,34.9
VBAT_REG on Top_Layer "VBAT_REG_L01_P015" (solid, pour order 15): 27.9,21.2 26.3,21.2 26,21.5 26,28.3 28,30.3 28,37.5 28.3,37.8 31.8,37.8 32.1,37.5 32.1,36.3 32.4,36 36.9,36 37,36.1 38.3,36.1 38.4,36 38.4,34.5 37.3,33.4 37.3,31.4 37.2,31.3 33.7,31.3 33.7,27.5 31.5,25.3 28.8,25.3 28.2,24.7 28.2,21.5
BUCK2_SW on Top_Layer "BUCK2_SW_L01_P019" (solid, pour order 19): 42.7,15.5 43.4,15.5 43.5,15.4 43.5,14.4 43.7,14.2 48.8,14.2 49,14 49,13.7 49.1,13.6 54.6,13.6 54.8,13.4 54.8,9.3 54.4,8.9 44.9,8.9 44.5,9.3 44.5,12.5 44,13 42.9,13 42.7,13.2
GND on Top_Layer "GND_L01_P011" (solid, pour order 11): 39.5,35.1 40.7,35.1 40.9,34.9 40.9,34.4 41.2,34.1 41.2,33.8 41.4,33.6 43.1,33.6 43.1,28.9 42.9,28.7 42.6,28.2 42.3,27.9 42.2,27.8 40.7,27.8 39.9,28.6 39.9,29.7 39.7,29.9 38.2,29.9 37.9,30.2 37.9,31.1 38.4,31.6 38.4,33.5 38.7,33.8 38.7,34.3
BUCK1_SW on Top_Layer "BUCK1_SW_L01_P010" (solid, pour order 10): 40.4,41.7 40.4,40.7 40.5,40.6 41.1,40.6 41.1,39.9 41.5,39.5 41.5,36.4 41.2,36.1 39.5,36.1 39.4,36 39.4,35.6 39.5,35.5 41.3,35.5 41.5,35.3 41.5,34.8 41.7,34.6 43.7,34.6 44,34.9 44,40.4 42.6,41.8 40.6,41.8
+3V3_BUCK on Top_Layer "+3V3_BUCK_L01_P009" (solid, pour order 9): 59.9,36.8 59.3,36.2 58.3,36.2 57.7,36.8 57.7,40.8 56.8,41.7 56.8,42.4 50.6,42.4 50.1,41.9 49.5,41.3 49.5,39.9 48.8,39.2 45.6,39.2 45.2,39.6 45.1,39.7 45.1,44.8 45.9,45.6 57.7,45.6 58.9,44.4 58.9,42.9 59.9,41.9
GND on INT_L1_GND "GND_L02_P023" (solid, pour order 23): 0.75,46.25 64.25,46.25 64.25,0.75 0.75,0.75
GND on INT_L2_GND "GND_L03_P024" (solid, pour order 24): 0.75,46.25 64.25,46.25 64.25,0.75 0.75,0.75

## Silkscreen, mask and mechanical layers (free items; w line width, h text height)
Top Overlay:
  lines w0.4: 5.3,1.1 5.3,6 44.3,6 44.3,1.1 5.3,1.1
  text "K" at 20.1,44.9 h1.2
  text "GND" at 53.9,41.1 h1.2
  text "+3" at 58,41.1 h1.2
  text "+" at 3.654,40.6 h1.52
  text "+" at 63.154,30.4 h1.52
  text "+" at 28.654,24.5 h1.52
  text "+" at 63.154,22.3 h1.52
  text "+" at 20.154,17.6 h1.52
  text "FUSION FIGHTERS" at 6.2,2.3 h2.6
Mechanical 1:
  the board outline again, w0.254
Board Shape:
  the board outline again, w0.254